# Altium PCB PCB1.PcbDoc
Units mm, origin at the board's own origin, x right, y up, seen from the top; angles counter-clockwise.
Board outline 152.4 x 101.6 mm, 2 copper layers (Top Layer, Bottom Layer); 11 components, 8 nets, 24 pads, 0 vias.
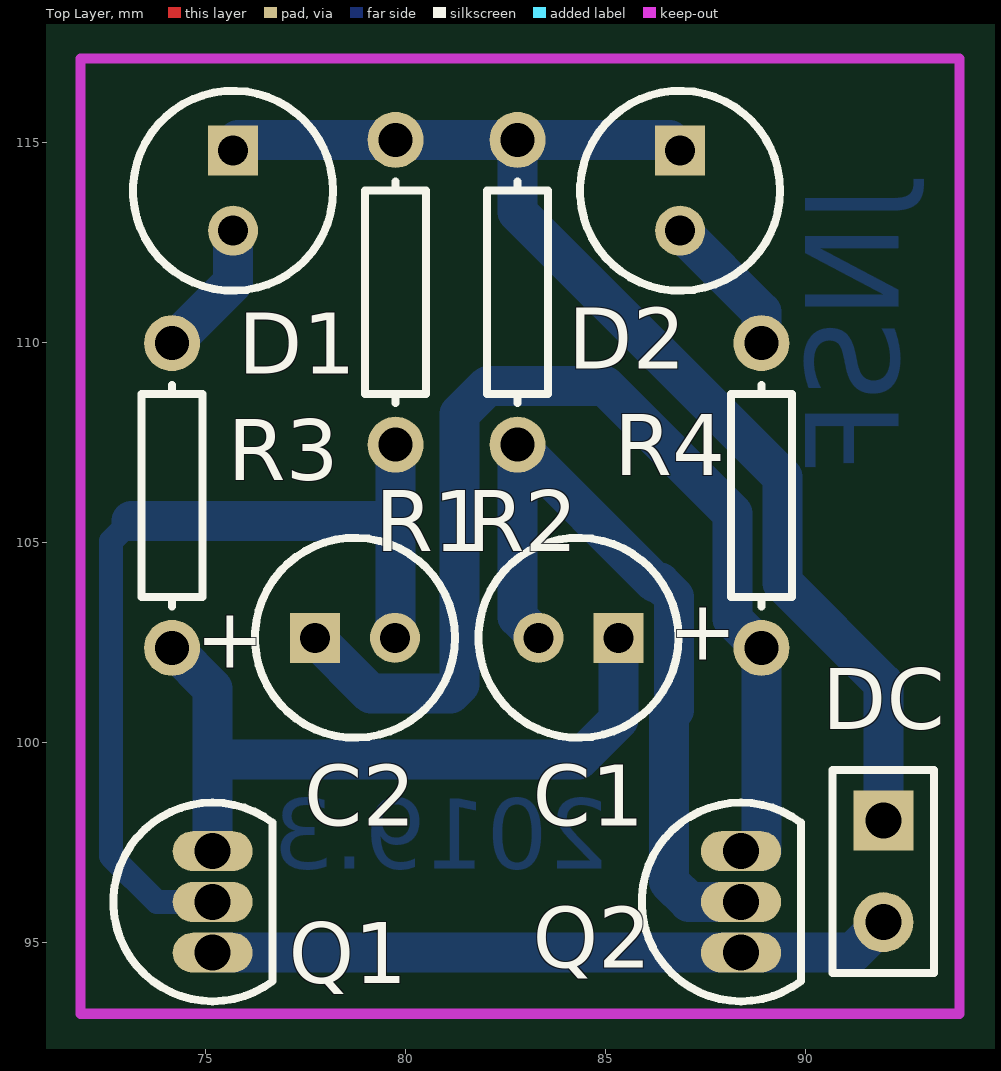
[diagram p0: Top Layer view]
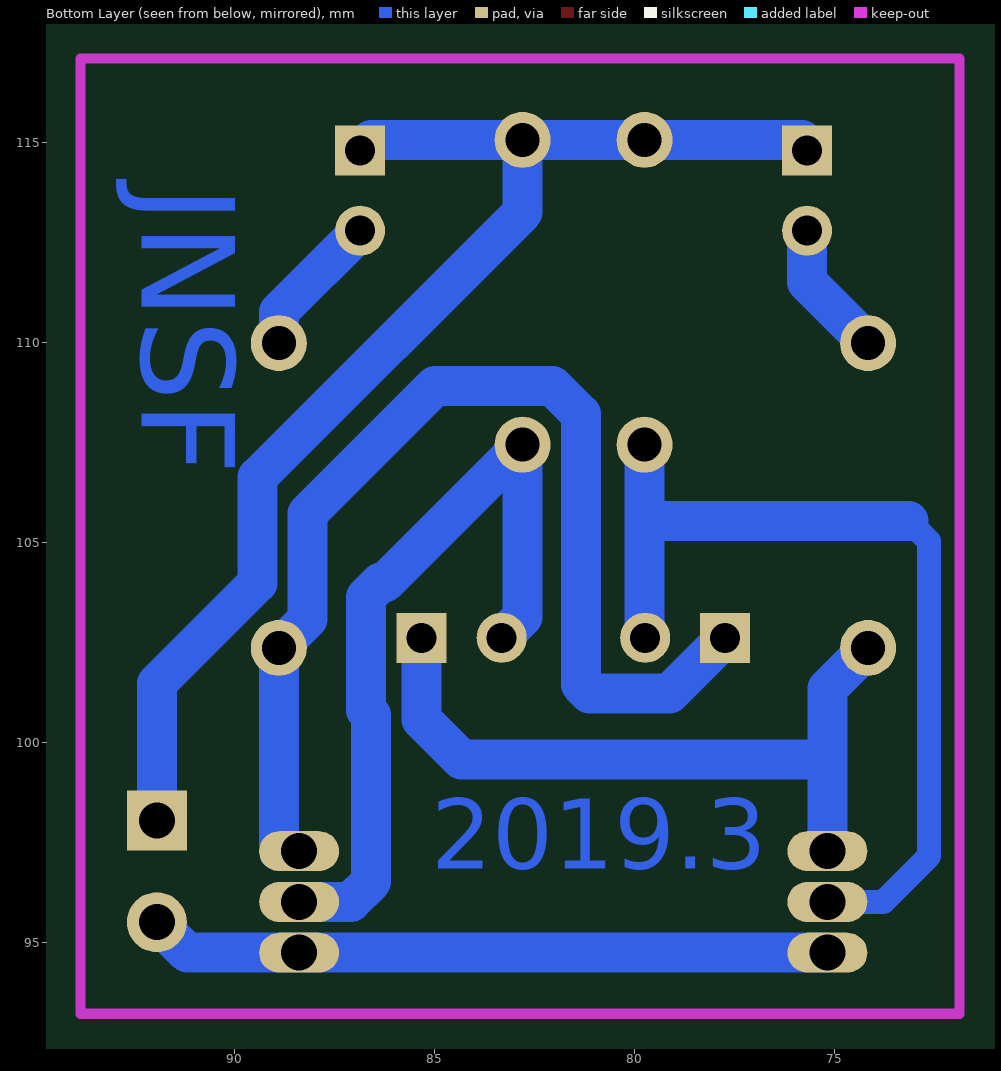
[diagram p1: Bottom Layer view, seen from below]

## Layer stack, top to bottom
Top Layer: signal copper 0.0356
Dielectric: dielectric 0.32, FR-4, Dk 4.8
Bottom Layer: signal copper 0.0356

## Board outline
25.4,25.4 177.8,25.4 177.8,127 25.4,127

## Design rules (kind name [scope] priority, off if disabled: settings)
Clearance [All] p1: gap=0.254
PolygonConnect [All] p1: connectstyle=Relief reliefconductorwidth=0.254 reliefentries=4 polygonreliefangle="90 Angle"
RoutingLayers [All] p1: top layer_v5=FALSE bottom layer_v5=TRUE
RoutingVias [All] p1: holewidth=0.711 width=1.27 viastyle="Through Hole" minholewidth=0.711 minwidth=1.27 maxholewidth=0.711 maxwidth=1.27
SilkscreenOverComponentPads [All] p1: minsilkscreentomaskgap=0.254
SolderMaskExpansion [All] p1: expansion=0.102
Width [All] p1: maxlimit=1 minlimit=0.254 preferedwidth=1
26 further rules are at their usual default settings.

## Components (designator, comment, footprint, x,y, rotation, side; value= is the part's Value field where it differs from the comment)
C1 "10U" CAPPR2-5x6.8 84.328,102.616 r180 top
C2 "10U" CAPPR2-5x6.8 78.74,102.616 r0 top
D1 "" CAPPR2-5x6.8 75.692,113.792 r270 top
D2 "" CAPPR2-5x6.8 86.868,113.792 r270 top
DC "3V" HDR1X2 91.948,98.044 r270 top
Q1 "9013" BCY-W3/E4 75.184,96.012 r0 top
Q2 "9013" BCY-W3/E4 88.392,96.012 r0 top
R1 "47K" AXIAL-0.3 79.756,111.252 r90 top
R2 "47K" AXIAL-0.3 82.804,111.252 r90 top
R3 "510" AXIAL-0.3 74.168,106.172 r90 top
R4 "510" AXIAL-0.3 88.9,106.172 r90 top

## Footprints (in the part's own frame and the unit in brackets; to place one, negate y for a bottom-side part, rotate by r counter-clockwise, add the part's x,y. Pads: shape width x height; smd on the part's side, far side on the other; paste and mask are expansions set on the pad)
AXIAL-0.3 [mm] "Axial Device, Thru-Hole; 2 Leads; 0.3 in Pin Spacing"
  round 1.4 hole 0.85: 1(-3.81,0) 2(3.81,0)
  silkscreen extent -2.77,-0.76 2.77,0.76
BCY-W3/E4 [mm] "TO, Flat Index; 3 In-Line, Axial Leads; Body Dia. 4.5mm; Leads 0.51 x 0.48 mm (max)"
  oval 2x1 hole 0.9: 1(0,-1.27) 2(0,0) 3(0,1.27)
  silkscreen extent -2.48,-2.48 1.5,2.48
CAPPR2-5x6.8 [mm] "Capacitor, Electrolytic, Radial; Body 5 x 6.8 mm (Dia.xH typ); Pin Spacing 2 mm (typ)"
  rect 1.25x1.25 hole 0.75: 1(-1,0)
  round 1.25 hole 0.75: 2(1,0)
  silkscreen extent -2.5,-2.5 2.5,2.5
HDR1X2 [mm] "Connector; Header; 2 Position"
  rect 1.5x1.5 hole 0.9: 1(0,0)
  round 1.5 hole 0.9: 2(2.54,0)
  silkscreen extent -1.27,-1.27 3.81,1.27

## Part data
C1 C2: library part "Cap Pol2", "Polarized Capacitor (Axial)"
D1 D2: library part LED0, "Typical INFRARED GaAs LED"
DC: library part "Header 2", "Header, 2-Pin"
Q1 Q2: library part 2N3904, "NPN General Purpose Amplifier"
R1 R2 R3 R4: library part Res1, "Resistor"

## Nets (pads, with @x,y where several pads share a name; then routed paths per layer and width w, separated by ;. In a path a pad name is that pad's centre, name@x,y a point inside that pad or via, vN(x,y) a via of type N, cw(c..) or ccw(c..) an arc to the next point about the centre after c; other vN are vias at no path point)
GND: DC.2 Q1.1 Q2.1 | length 17.1
  Bottom Layer w1: Q1.1 Q2.1 91.186,94.742 DC.2
NetC1_1: C1.1 Q1.3 R3.1 | length 18.1
  Bottom Layer w1: R3.1 75.184,101.346 75.184,99.568 ; Q1.3 75.184,99.568 ; C1.1 85.328,100.568 84.328,99.568 75.184,99.568
NetC1_2: C1.2 Q2.2 R2.1 | length 19.7
  Bottom Layer w1: C1.2 82.804,103.14 R2.1 86.251,103.995 86.36,103.995 86.716,103.639 86.716,100.813 86.589,100.686 86.589,96.52 87.097,96.012 Q2.2
NetC2_1: C2.1 Q2.3 R4.1 | length 28.7
  Bottom Layer w1: C2.1 79.137,101.219 81.128,101.219 81.35,101.441 81.35,108.204 82.061,108.915 84.989,108.915 88.177,105.727 88.177,103.085 R4.1 88.9,97.282 Q2.3
NetC2_2: C2.2 Q1.2 R1.1 | length 23.1
  Bottom Layer w0.6: 73.152,105.537 72.644,105.029 72.644,97.155 73.787,96.012 Q1.2
  Bottom Layer w1: 73.152,105.537 79.756,105.537 ; C2.2 79.74,102.969 79.756,102.969 79.756,105.537 ; R1.1 79.756,105.537
NetD1_2: D1.2 R3.2 | length 3.4
  Bottom Layer w1: R3.2 75.692,111.506 D1.2
NetD2_2: D2.2 R4.2 | length 3.7
  Bottom Layer w1: D2.2 88.9,110.76 R4.2
VCC: D1.1 D2.1 DC.1 R1.2 R2.2 | length 32
  Bottom Layer w1: D1.1@75.819,115.062 R1.2 R2.2 ; D2.1 86.598,115.062 R2.2 ; DC.1 91.948,101.473 89.431,103.99 89.431,106.632 82.804,113.259 R2.2

## Keep-outs
Keep-Out Layer:
  lines w0.254: 71.882,93.218 93.853,93.218 93.853,117.094 71.882,117.094 71.882,93.218

## Other copper
Bottom Layer:
  text "JNSF" at 93.091,113.919 h4 r90
  text "2019.3" at 85.09,96.266 h3

## Text inside footprints (layer, text, board x,y; h text height)
C1: Top Overlay "+" at 88.303,103.366 h1.5 r180
C2: Top Overlay "+" at 74.765,101.866 h1.5